# Altium PCB PCB1.PcbDoc (part 8 of 10)
Units mm, origin at the board's own origin, x right, y up, seen from the top; angles counter-clockwise.
Board outline 171.83 x 244.04 mm, 2 copper layers (Top Layer, Bottom Layer); 100 components, 186 nets, 878 pads, 221 vias.
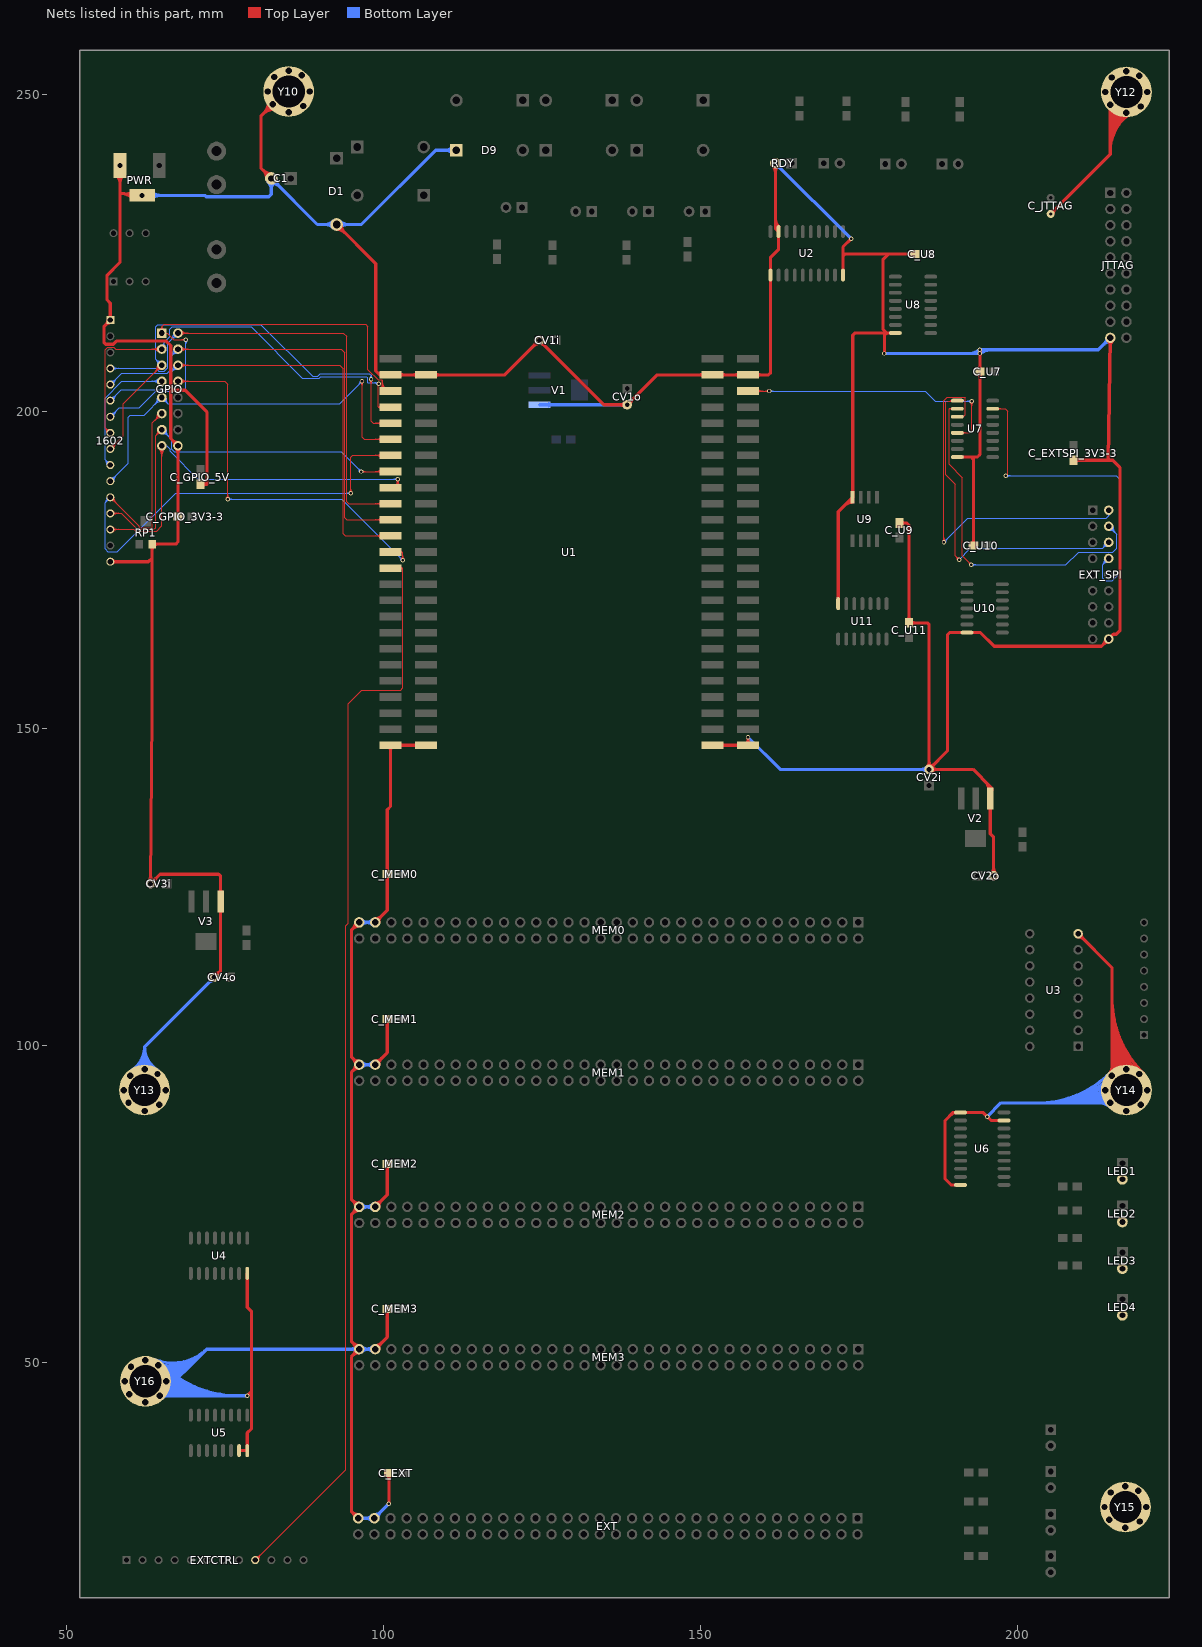
[diagram p8: the nets of this part, all layers, seen from the top]

## Via types
v1: diameter 0.7, hole 0.4, Top Layer to Bottom Layer, 221 vias

## Nets (pads, with @x,y where several pads share a name; then routed paths per layer and width w, separated by ;. In a path a pad name is that pad's centre, name@x,y a point inside that pad or via, vN(x,y) a via of type N, cw(c..) or ccw(c..) an arc to the next point about the centre after c; other vN are vias at no path point) (continued)
GND: 1602.1 1602.16 C1.2 C_EXT.1 C_EXTSPI_3V3-3.2 C_GPIO_3V3-3.1 C_GPIO_5V.1 C_JTTAG.2 C_MEM0.1 C_MEM1.1 C_MEM2.1 C_MEM3.1 C_U7.1 C_U8.1 C_U9.1 C_U10.1 C_U11.1 CV1i.2 CV1o.2 CV2i.2 CV2o.2 CV3i.2 CV4o.2 D1.1 D9.2 EXT.61 EXT.63 EXT_SPI.18 GPIO.16 JTTAG.19 LED1.2 LED2.2 LED3.2 LED4.2 MEM0.61 MEM0.63 MEM1.61 MEM1.63 MEM2.61 MEM2.63 MEM3.61 MEM3.63 PWR.2 PWR.3 RDY.2 RP1.3 U1.3 U1.4 U1.49 U1.50 U1.53 U1.54 U1.99 U1.100 U2.1 U2.10 U2.19 U3.8 U4.8 U5.7 U5.8 U6.1 U6.10 U6.19 U7.8 U8.8 U9.4 U10.7 U11.7 V1.1 V2.1 V3.1 Y10.1 Y10.2 Y10.3 Y10.4 Y10.5 Y10.6 Y10.7 Y10.8 Y10.9 Y12.1 Y12.2 Y12.3 Y12.4 Y12.5 Y12.6 Y12.7 Y12.8 Y12.9 Y13.1 Y13.2 Y13.3 Y13.4 Y13.5 Y13.6 Y13.7 Y13.8 Y13.9 Y14.1 Y14.2 Y14.3 Y14.4 Y14.5 Y14.6 Y14.7 Y14.8 Y14.9 Y15.1 Y15.2 Y15.3 Y15.4 Y15.5 Y15.6 Y15.7 Y15.8 Y15.9 Y16.1 Y16.2 Y16.3 Y16.4 Y16.5 Y16.6 Y16.7 Y16.8 Y16.9 | length 1907.8
  Top Layer w0.508: 1602.1@56.515,214.376 cw(c55.595,214.376) 56.246,213.726 cw(c56.896,213.075) 1602.1@56.896,213.995 ; 1602.1@56.627,214.645 ccw(c55.976,215.296) 56.896,215.296 ccw(c57.816,215.296) 1602.1@57.165,214.645 ; 1602.16@56.896,176.276 62.912,176.276 63.484,176.847 ; 1602.16@57.165,176.007 cw(c57.816,175.356) 57.816,176.276 cw(c57.816,177.196) 1602.16@57.165,176.545 ; PWR.2@57.892,237.233 cw(c56.619,235.959) 58.42,235.959 cw(c60.221,235.959) PWR.2@58.948,237.233 ; PWR.2@58.42,238.76 58.42,234.377 ; Y13.2@58.733,92.665 cw(c58.082,92.014) 59.002,92.014 cw(c59.922,92.014) Y13.2@59.272,92.665 ; Y16.2@58.869,46.733 cw(c58.218,46.083) 59.138,46.083 cw(c60.058,46.083) Y16.2@59.408,46.733 ; 58.917,234.332 cw(c58.727,232.232) PWR.3@60.347,233.582 ; Y13.2@59.002,93.315 ccw(c59.002,94.235) 59.653,93.585 ccw(c60.303,92.934) Y13.2@59.383,92.934 ; Y16.2@59.138,47.383 ccw(c59.138,48.303) 59.789,47.653 ccw(c60.439,47.002) Y16.2@59.519,47.002 ; 59.352,234.293 ccw(c59.487,235.779) PWR.3@60.442,234.633 ; Y13.8@59.383,90.902 ccw(c58.463,90.902) 59.114,91.553 ccw(c59.764,92.203) Y13.8@59.764,91.283 ; Y16.8@59.519,44.97 ccw(c58.599,44.97) 59.25,45.621 ccw(c59.9,46.271) Y16.8@59.9,45.351 ; Y13.6@59.749,94.951 cw(c59.098,94.3) 60.018,94.3 cw(c60.938,94.3) Y13.6@60.288,94.951 ; Y13.8@59.764,90.902 59.002,91.664 Y13.2@59.002,92.934 60.018,93.95 Y13.6@60.018,95.22 ; Y16.6@59.885,49.019 cw(c59.234,48.369) 60.154,48.369 cw(c61.074,48.369) Y16.6@60.424,49.019 ; Y16.8@59.9,44.97 59.138,45.732 Y16.2@59.138,47.002 60.154,48.018 Y16.6@60.154,49.288 ; PWR.3@61.92,234.06 58.42,234.377 ; CV3i.2@62.879,125.843 ccw(c62.02,126.719) 63.247,126.707 ccw(c64.473,126.696) CV3i.2@63.598,125.837 ; CV3i.2@63.235,125.989 ccw(c63.235,127.215) 64.102,126.348 ccw(c64.97,125.481) CV3i.2@63.743,125.481 ; RP1.3@63.239,178.753 cw(c62.649,178.163) 63.484,178.163 cw(c64.319,178.163) RP1.3@63.729,178.753 ; RP1.3@63.729,178.803 cw(c64.319,178.213) 64.319,179.048 cw(c64.319,179.883) RP1.3@63.729,179.293 ; GPIO.16@67.068,194.564 ccw(c65.871,194.564) 66.717,195.411 ccw(c67.564,196.257) GPIO.16@67.564,195.06 ; GPIO.16@67.213,194.213 cw(c66.367,193.367) 67.564,193.367 cw(c68.761,193.367) GPIO.16@67.915,194.213 ; C_GPIO_3V3-3.1@67.295,183.119 cw(c66.644,182.468) 67.564,182.468 cw(c68.484,182.468) C_GPIO_3V3-3.1@67.833,183.119 ; C_GPIO_3V3-3.1@67.295,183.657 ccw(c66.644,184.308) 67.564,184.308 ccw(c68.484,184.308) C_GPIO_3V3-3.1@67.833,183.657 ; C_GPIO_5V.1@71.12,188.468 72.111,188.468 72.136,188.493 72.136,199.898 68.707,203.327 66.421,203.327 ; C_GPIO_5V.1@71.389,188.199 cw(c72.04,187.548) 72.04,188.468 cw(c72.04,189.388) C_GPIO_5V.1@71.389,188.737 ; CV4o.2@73.268,110.738 74.295,111.765 V3.1@74.295,122.682 74.295,126.657 73.977,126.975 64.729,126.975 CV3i.2@63.235,125.481 63.484,152.369 63.484,176.847 ; CV4o.2@73.268,111.246 ccw(c73.268,112.473) 74.135,111.605 ccw(c75.003,110.738) CV4o.2@73.776,110.738 ; V3.1@74.121,121.258 cw(c73.701,120.838) 74.295,120.838 cw(c74.889,120.838) V3.1@74.469,121.258 ; V3.1@74.121,124.106 ccw(c73.701,124.526) 74.295,124.526 ccw(c74.889,124.526) V3.1@74.469,124.106 ; U5.7@77.216,36.068 U5.8@78.486,36.068 78.486,38.862 79.172,39.548 79.172,45.402 ; v1(78.486,44.716) 79.172,45.402 ; U4.8@78.486,64.008 78.486,58.674 79.172,57.988 79.172,45.402 ; 80.933,246.857 cw(c82.811,244.979) Y10.1@83.809,247.44 ; 81.048,246.972 ccw(c78.915,249.105) Y10.1@81.862,249.749 ; Y10.2@81.454,250.172 cw(c80.804,249.522) 81.723,249.522 cw(c82.643,249.522) Y10.2@81.993,250.172 ; 81.475,247.399 cw(c83.124,245.751) Y10.1@83.999,247.911 ; C1.2@81.55,236.728 ccw(c79.749,236.728) 81.022,238.002 ccw(c82.296,239.275) C1.2@82.296,237.474 ; 81.705,247.629 ccw(c79.993,249.341) Y10.1@82.358,249.858 ; Y10.2@81.723,250.822 ccw(c81.723,251.742) 82.374,251.092 ccw(c83.024,250.441) Y10.2@82.104,250.441 ; Y10.8@82.104,248.409 cw(c81.185,248.409) 81.835,247.759 cw(c82.485,247.109) Y10.8@82.485,248.028 ; Y10.8@82.257,248.714 ccw(c81.914,249.171) Y10.1@82.485,249.171 ; C1.2@82.296,236.728 80.645,238.379 80.645,246.569 Y10.8@82.485,248.409 Y10.1@82.485,249.171 ; Y10.6@82.47,252.458 cw(c81.82,251.808) 82.739,251.808 cw(c83.659,251.808) Y10.6@83.009,252.458 ; Y10.8@82.714,248.714 cw(c83.057,249.171) Y10.1@82.485,249.171 ; Y10.6@82.739,252.727 82.739,251.457 Y10.2@81.723,250.441 81.723,249.171 Y10.1@82.485,249.171 ; D1.1@92.583,228.72 cw(c92.583,226.919) 93.857,228.192 cw(c95.13,229.466) D1.1@93.329,229.466 ; D1.1@92.583,229.466 98.755,223.294 98.755,206.357 99.372,205.74 U1.53@101.092,205.74 U1.54@106.68,205.74 119.109,205.74 CV1i.2@124.576,211.207 134.753,201.03 CV1o.2@138.424,201.03 143.134,205.74 U1.3@151.892,205.74 U1.4@157.48,205.74 160.719,205.74 161.036,206.058 U2.1@161.036,221.488 161.036,224.282 162.306,225.552 U2.19@162.306,228.346 161.798,228.854 RDY.2@161.798,239.141 ; EXT.63@95.441,25.4 ccw(c94.062,25.4) 95.037,26.375 ccw(c96.012,27.35) EXT.63@96.012,25.971 ; MEM0.63@95.568,119.38 cw(c94.189,119.38) 95.164,118.405 cw(c96.139,117.43) MEM0.63@96.139,118.809 ; EXT.63@96.012,25.4 94.92,26.492 94.92,50.851 MEM3.63@96.139,52.07 94.92,53.289 94.92,73.287 MEM2.63@96.139,74.507 94.92,75.726 94.92,95.724 MEM1.63@96.139,96.943 94.92,98.163 94.92,118.161 MEM0.63@96.139,119.38 ; MEM3.63@96.139,51.499 ccw(c96.139,50.12) 95.164,51.095 ccw(c94.189,52.07) 95.568,52.07 ccw(c94.189,52.07) 95.164,53.045 ccw(c96.139,54.02) MEM3.63@96.139,52.641 ; MEM2.63@96.139,73.936 ccw(c96.139,72.557) 95.164,73.532 ccw(c94.189,74.507) 95.568,74.507 ccw(c94.189,74.507) 95.164,75.481 ccw(c96.139,76.456) MEM2.63@96.139,75.078 ; MEM1.63@96.139,96.372 ccw(c96.139,94.994) 95.164,95.969 ccw(c94.189,96.943) 95.568,96.943 ccw(c94.189,96.943) 95.164,97.918 ccw(c96.139,98.893) MEM1.63@96.139,97.514 ; MEM3.61@98.679,52.07 100.584,53.975 C_MEM3.1@100.584,58.42 ; MEM3.61@98.679,52.641 ccw(c98.679,54.02) 99.654,53.045 ccw(c100.629,52.07) MEM3.61@99.25,52.07 ; MEM2.61@98.679,74.507 100.584,76.412 C_MEM2.1@100.584,81.28 ; MEM2.61@98.679,75.078 ccw(c98.679,76.456) 99.654,75.481 ccw(c100.629,74.507) MEM2.61@99.25,74.507 ; MEM1.61@98.679,96.943 100.584,98.848 C_MEM1.1@100.584,104.14 ; MEM1.61@98.679,97.514 ccw(c98.679,98.893) 99.654,97.918 ccw(c100.629,96.943) MEM1.61@99.25,96.943 ; MEM0.61@98.679,119.38 100.584,121.285 C_MEM0.1@100.584,127 100.584,137.16 101.092,137.668 U1.99@101.092,147.32 U1.100@106.68,147.32 ; MEM0.61@98.679,119.951 ccw(c98.679,121.33) 99.654,120.355 ccw(c100.629,119.38) MEM0.61@99.25,119.38 ; 99.04,206.072 ccw(c99.419,206.451) U1.53@99.737,206.019 ; C_MEM3.1@100.315,58.151 cw(c99.664,57.5) 100.584,57.5 cw(c101.504,57.5) C_MEM3.1@100.853,58.151 ; C_MEM2.1@100.315,81.011 cw(c99.664,80.36) 100.584,80.36 cw(c101.504,80.36) C_MEM2.1@100.853,81.011 ; C_MEM1.1@100.315,103.871 cw(c99.664,103.22) 100.584,103.22 cw(c101.504,103.22) C_MEM1.1@100.853,103.871 ; C_MEM0.1@100.315,126.731 cw(c99.664,126.08) 100.584,126.08 cw(c101.504,126.08) C_MEM0.1@100.853,126.731 ; C_MEM0.1@100.315,127.269 ccw(c99.664,127.92) 100.584,127.92 ccw(c101.504,127.92) C_MEM0.1@100.853,127.269 ; C_EXT.1@100.569,32.243 cw(c99.918,31.592) 100.838,31.592 cw(c101.758,31.592) C_EXT.1@101.107,32.243 ; v1(100.838,27.686) C_EXT.1@100.838,32.512 ; U1.99@100.847,147.075 cw(c100.257,146.485) 101.092,146.485 cw(c101.927,146.485) U1.99@101.337,147.075 ; U1.99@102.487,147.075 cw(c103.077,146.485) 103.077,147.32 cw(c103.077,148.155) U1.99@102.487,147.565 ; U1.53@102.487,205.495 cw(c103.077,204.905) 103.077,205.74 cw(c103.077,206.575) U1.53@102.487,205.985 ; U1.100@105.285,147.075 ccw(c104.695,146.485) 104.695,147.32 ccw(c104.695,148.155) U1.100@105.285,147.565 ; U1.54@105.285,205.495 ccw(c104.695,204.905) 104.695,205.74 ccw(c104.695,206.575) U1.54@105.285,205.985 ; U1.54@108.075,205.495 cw(c108.665,204.905) 108.665,205.74 cw(c108.665,206.575) U1.54@108.075,205.985 ; CV1i.2@124.068,211.207 cw(c122.842,211.207) 123.709,210.34 cw(c124.576,209.472) 124.576,210.699 cw(c124.576,209.472) 125.443,210.34 cw(c126.311,211.207) CV1i.2@125.084,211.207 ; CV1o.2@138.065,200.671 ccw(c137.198,199.804) 137.198,201.03 ccw(c137.198,202.257) CV1o.2@138.065,201.389 ; CV1o.2@138.424,201.538 ccw(c138.424,202.765) 139.291,201.897 ccw(c140.159,201.03) CV1o.2@138.932,201.03 ; U1.3@150.497,205.495 ccw(c149.907,204.905) 149.907,205.74 ccw(c149.907,206.575) U1.3@150.497,205.985 ; U1.49@151.892,147.32 U1.50@157.48,147.32 v1(157.48,148.59) ; U1.49@153.287,147.075 cw(c153.877,146.485) 153.877,147.32 cw(c153.877,148.155) U1.49@153.287,147.565 ; U1.3@153.287,205.495 cw(c153.877,204.905) 153.877,205.74 cw(c153.877,206.575) U1.3@153.287,205.985 ; U1.50@156.085,147.075 ccw(c155.495,146.485) 155.495,147.32 ccw(c155.495,148.155) U1.50@156.085,147.565 ; U1.4@156.085,205.495 ccw(c155.495,204.905) 155.495,205.74 ccw(c155.495,206.575) U1.4@156.085,205.985 ; U1.50@157.235,147.565 ccw(c156.645,148.155) 157.48,148.155 ccw(c158.315,148.155) U1.50@157.725,147.565 ; U1.4@158.875,205.495 cw(c159.465,204.905) 159.465,205.74 cw(c159.465,206.575) U1.4@158.875,205.985 ; RDY.2@161.377,238.72 cw(c160.359,237.702) 161.798,237.702 cw(c163.237,237.702) RDY.2@162.219,238.72 ; 161.798,230.406 ccw(c163.655,230.406) U2.19@162.342,229.093 ; U11.7@171.704,169.672 171.704,184.152 U9.4@173.988,186.436 173.988,212.025 174.308,212.344 179.387,212.344 ; U2.10@172.466,221.488 172.466,224.472 ; 172.688,185.135 cw(c173.988,183.834) U9.4@173.988,185.674 ; 173.555,186.002 cw(c173.988,185.569) U9.4@173.988,186.182 ; v1(173.736,227.203) 172.466,225.933 172.466,224.472 ; v1(178.994,209.118) 178.994,211.95 179.387,212.344 ; U8.8@180.721,212.344 179.387,212.344 ; C_U9.1@181.356,182.372 182.562,182.372 182.88,182.054 C_U11.1@182.88,166.624 185.737,166.624 186.038,166.323 CV2i.2@186.038,143.515 ; C_U9.1@181.625,182.103 cw(c182.276,181.452) 182.276,182.372 cw(c182.276,183.292) C_U9.1@181.625,182.641 ; C_U11.1@182.611,167.02 ccw(c181.96,167.671) 182.88,167.671 ccw(c183.8,167.671) C_U11.1@183.149,167.02 ; C_U11.1@183.149,166.355 cw(c183.8,165.704) 183.8,166.624 cw(c183.8,167.544) C_U11.1@183.149,166.893 ; C_U8.1@183.373,224.521 ccw(c182.722,223.87) 182.722,224.79 ccw(c182.722,225.71) C_U8.1@183.373,225.059 ; C_U8.1@183.769,224.79 179.641,224.79 ; CV2i.2@185.679,143.874 ccw(c184.812,144.741) 186.038,144.741 ccw(c187.265,144.741) 186.398,143.874 ccw(c187.265,144.741) 187.265,143.515 ccw(c187.265,142.289) CV2i.2@186.398,143.156 ; CV2i.2@186.038,144.023 ccw(c186.038,145.249) 186.906,144.382 ccw(c187.773,143.515) CV2i.2@186.546,143.515 ; 189.473,89.016 cw(c190.297,88.192) U6.1@190.297,89.357 ; 189.649,89.192 cw(c190.109,88.732) U6.1@190.283,89.359 ; U7.8@190.5,192.786 192.722,192.786 ; U6.10@191.008,77.978 189.496,77.978 188.555,78.919 188.555,88.098 189.865,89.408 U6.1@191.008,89.408 194.539,89.408 195.219,88.742 195.837,88.138 ; C_U10.1@192.771,179.085 ccw(c192.12,179.736) 193.04,179.736 ccw(c193.96,179.736) C_U10.1@193.309,179.085 ; C_U10.1@193.04,178.816 193.04,192.469 192.722,192.786 ; C_U7.1@193.787,205.979 cw(c193.136,205.328) 194.056,205.328 cw(c194.976,205.328) C_U7.1@194.325,205.979 ; C_U7.1@193.787,206.517 ccw(c193.136,207.168) 194.056,207.168 ccw(c194.976,207.168) C_U7.1@194.325,206.517 ; v1(194.056,209.702) v1(194.056,209.118) C_U7.1@194.056,206.248 194.056,193.167 193.675,192.786 192.722,192.786 ; 194.837,141.662 cw(c193.358,140.182) V2.1@195.45,140.182 ; v1(195.226,88.749) 195.837,88.138 ; V2.1@195.522,137.508 cw(c195.102,137.088) 195.696,137.088 cw(c196.29,137.088) V2.1@195.87,137.508 ; V2.1@195.522,140.356 ccw(c195.102,140.776) 195.696,140.776 ccw(c196.29,140.776) V2.1@195.87,140.356 ; 195.705,140.795 cw(c195.092,140.182) V2.1@195.958,140.182 ; CV2o.2@195.856,127.105 ccw(c194.989,127.972) 196.215,127.972 ccw(c197.441,127.972) CV2o.2@196.574,127.105 ; CV2o.2@196.215,126.746 196.215,132.842 195.696,133.361 V2.1@195.696,138.932 195.696,140.803 192.984,143.515 CV2i.2@186.038,143.515 ; U6.19@197.866,88.138 195.837,88.138 ; C_JTTAG.2@205.222,231.13 214.625,240.533 Y12.8@214.625,248.33 213.863,249.092 Y12.2@213.863,250.362 214.879,251.378 Y12.6@214.879,252.648 ; C_JTTAG.2@205.222,231.511 ccw(c205.222,232.431) 205.873,231.781 ccw(c206.523,231.13) C_JTTAG.2@205.603,231.13 ; C_EXTSPI_3V3-3.2@208.788,192.278 214.312,192.278 ; C_EXTSPI_3V3-3.2@209.057,192.009 cw(c209.708,191.358) 209.708,192.278 cw(c209.708,193.198) C_EXTSPI_3V3-3.2@209.057,192.547 ; U3.8@209.55,117.106 cw(c209.55,115.909) 210.397,116.755 cw(c211.243,117.602) U3.8@210.046,117.602 ; U3.8@209.55,117.602 214.879,112.273 Y14.6@214.879,95.22 214.879,93.95 Y14.2@213.863,92.934 213.863,91.664 Y14.8@214.625,90.902 ; Y15.2@213.438,26.902 cw(c212.788,26.251) 213.707,26.251 cw(c214.627,26.251) Y15.2@213.977,26.902 ; Y14.2@213.594,92.665 cw(c212.943,92.014) 213.863,92.014 cw(c214.783,92.014) Y14.2@214.132,92.665 ; Y12.2@213.594,250.092 cw(c212.943,249.442) 213.863,249.442 cw(c214.783,249.442) Y12.2@214.132,250.092 ; Y15.2@213.707,27.552 ccw(c213.707,28.472) 214.358,27.821 ccw(c215.008,27.171) Y15.2@214.088,27.171 ; Y14.2@213.863,93.315 ccw(c213.863,94.235) 214.513,93.585 ccw(c215.164,92.934) Y14.2@214.244,92.934 ; Y12.2@213.863,250.743 ccw(c213.863,251.663) 214.513,251.012 ccw(c215.164,250.362) Y12.2@214.244,250.362 ; EXT_SPI.18@213.88,164.084 cw(c212.683,164.084) 213.529,163.237 cw(c214.376,162.391) EXT_SPI.18@214.376,163.588 ; Y15.8@214.088,25.139 ccw(c213.169,25.139) 213.819,25.789 ccw(c214.469,26.44) Y15.8@214.469,25.52 ; JTTAG.19@214.22,211.185 cw(c213.229,210.226) 214.607,210.204 cw(c215.986,210.181) JTTAG.19@215.027,211.172 ; Y14.8@214.244,90.902 ccw(c213.324,90.902) 213.975,91.553 ccw(c214.625,92.203) Y14.8@214.625,91.283 ; Y12.8@214.244,248.33 ccw(c213.324,248.33) 213.975,248.98 ccw(c214.625,249.631) Y12.8@214.625,248.711 ; Y12.8@214.356,248.06 cw(c213.705,247.41) 214.625,247.41 cw(c215.545,247.41) Y12.8@214.894,248.06 ; Y15.6@214.454,29.188 cw(c213.804,28.537) 214.723,28.537 cw(c215.643,28.537) Y15.6@214.993,29.188 ; Y15.8@214.469,25.139 213.707,25.901 Y15.2@213.707,27.171 214.723,28.187 Y15.6@214.723,29.457 ; Y14.6@214.516,95.583 ccw(c213.639,96.46) 214.879,96.46 ccw(c220.691,96.46) Y14.1@216.581,92.351 ; Y14.6@214.61,94.951 cw(c213.959,94.3) 214.879,94.3 cw(c215.799,94.3) Y14.6@215.148,94.951 ; Y14.6@214.61,95.49 ccw(c213.959,96.14) 214.879,96.14 ccw(c215.799,96.14) Y14.6@215.148,95.49 ; Y12.6@214.61,252.378 cw(c213.959,251.728) 214.879,251.728 cw(c215.799,251.728) Y12.6@215.148,252.378 ; 214.625,241.03 cw(c221.81,241.03) Y12.1@218.608,247.463 ; 214.625,241.851 cw(c221.401,241.851) Y12.1@218.382,247.917 ; 214.625,242.671 cw(c220.993,242.671) Y12.1@218.155,248.372 ; 214.625,243.491 cw(c220.585,243.491) Y12.1@217.929,248.827 ; 214.625,244.312 cw(c220.176,244.312) Y12.1@217.703,249.282 ; 214.625,245.132 cw(c219.768,245.132) Y12.1@217.476,249.736 ; 214.625,245.952 cw(c219.36,245.952) Y12.1@217.25,250.191 ; 214.625,246.773 cw(c218.951,246.773) Y12.1@217.023,250.646 ; JTTAG.19@214.63,211.582 214.312,192.278 ; 214.879,97.687 ccw(c221.917,97.687) Y14.1@216.94,92.71 ; 214.879,98.913 ccw(c223.144,98.913) Y14.1@217.3,93.069 ; 214.879,100.14 ccw(c224.37,100.14) Y14.1@217.659,93.428 ; 214.879,101.366 ccw(c225.597,101.366) Y14.1@218.018,93.787 ; 214.879,102.592 ccw(c226.823,102.592) Y14.1@218.377,94.147 ; 214.879,103.819 ccw(c228.049,103.819) Y14.1@218.736,94.506 ; 214.879,105.045 ccw(c229.276,105.045) Y14.9@219.096,94.865 ; 214.879,106.272 ccw(c230.502,106.272) Y14.9@219.455,95.224 ; 214.879,107.498 ccw(c231.729,107.498) Y14.9@219.814,95.583 ; 58.42,234.377 58.42,223.52 56.388,221.488 56.388,217.551 56.896,217.043 1602.1@56.896,214.376 55.88,213.36 55.88,210.883 56.172,210.591 57.379,210.591 57.861,211.074 65.722,211.074 66.421,210.375 66.421,203.327 ; 63.484,176.847 RP1.3@63.484,179.048 67.225,179.048 67.564,179.387 C_GPIO_3V3-3.1@67.564,183.388 GPIO.16@67.564,194.564 66.421,195.707 66.421,203.327 ; 172.466,224.472 172.784,224.79 179.641,224.79 ; 179.387,212.344 178.765,212.928 178.765,223.914 179.641,224.79 ; CV2i.2@186.038,143.515 188.951,146.427 188.951,164.782 189.268,165.1 U10.7@192.024,165.1 194.158,165.1 196.317,162.941 213.233,162.941 EXT_SPI.18@214.376,164.084 215.123,164.831 215.582,164.831 216.142,165.391 216.142,191.147 215.011,192.278 214.312,192.278
  Bottom Layer w0.508: Y13.1@60.287,96.091 ccw(c57.934,99.774) 62.304,99.774 ; Y13.1@60.561,95.663 ccw(c58.527,98.846) 62.304,98.846 ccw(c66.082,98.846) Y13.9@64.048,95.663 ; Y13.1@60.834,95.235 ccw(c59.119,97.919) 62.304,97.919 ccw(c65.489,97.919) Y13.9@63.774,95.235 ; Y13.1@61.108,94.807 ccw(c59.712,96.992) 62.304,96.992 ccw(c64.896,96.992) Y13.1@63.501,94.807 ; Y16.1@61.857,46.419 ccw(c65.966,50.528) 65.966,44.716 ccw(c65.966,43.477) Y16.7@65.089,44.353 ; PWR.3@61.92,234.06 71.781,234.06 71.984,233.858 81.915,233.858 82.296,234.239 C1.2@82.296,236.728 89.558,229.466 D1.1@92.583,229.466 96.497,229.466 108.204,241.173 D9.2@111.483,241.173 ; Y16.1@61.925,45.773 ccw(c63.622,49.823) 66.727,46.718 ; Y13.5@62.035,96.506 ccw(c61.384,97.156) 62.304,97.156 ccw(c63.224,97.156) Y13.5@62.574,96.506 ; Y16.1@62.121,46.241 ccw(c63.938,50.577) 67.263,47.253 ; Y16.1@62.216,46.778 ccw(c67.193,51.755) 67.193,44.716 ; Y13.4@62.304,89.632 63.32,90.648 Y13.7@64.59,90.648 ; Y13.4@62.304,90.013 ccw(c62.304,90.933) 62.955,90.283 ccw(c63.605,89.632) Y13.4@62.685,89.632 ; Y13.5@62.304,95.855 cw(c62.304,94.935) 62.955,95.586 cw(c63.605,96.236) Y13.5@62.685,96.236 ; Y16.1@62.318,46.71 ccw(c64.254,51.332) 67.798,47.788 ; Y16.4@62.44,43.7 63.456,44.716 Y16.7@64.726,44.716 ; Y16.4@62.44,44.081 ccw(c62.44,45.001) 63.091,44.351 ccw(c63.741,43.7) Y16.4@62.821,43.7 ; Y16.5@62.44,49.923 cw(c62.44,49.004) 63.091,49.654 cw(c63.741,50.304) Y16.5@62.821,50.304 ; Y16.5@62.44,50.304 63.202,49.542 Y16.9@64.472,49.542 ; Y16.1@62.514,47.178 ccw(c64.57,52.086) 68.333,48.323 ; Y16.1@62.575,47.137 ccw(c68.419,52.981) 68.419,44.716 ; Y16.1@62.71,47.647 ccw(c64.887,52.84) 68.868,48.858 ; Y16.1@62.907,48.115 ccw(c65.203,53.594) 69.403,49.394 ; Y16.1@62.934,47.496 ccw(c69.646,54.208) 69.646,44.716 ; Y16.1@63.103,48.584 ccw(c65.519,54.349) 69.939,49.929 ; Y16.1@63.293,47.856 ccw(c70.872,55.434) 70.872,44.716 ; Y16.1@63.299,49.052 ccw(c65.835,55.103) 70.474,50.464 ; PWR.3@63.448,233.532 cw(c64.721,232.259) 64.721,234.06 cw(c64.721,235.861) PWR.3@63.448,234.587 ; Y16.1@63.496,49.521 ccw(c66.151,55.857) 71.009,50.999 ; Y16.1@63.653,48.215 ccw(c72.098,56.661) 72.098,44.716 ; Y16.1@63.692,49.989 ccw(c66.467,56.612) 71.544,51.534 ; Y16.1@63.888,50.458 ccw(c66.783,57.366) 72.079,52.07 ; Y16.1@64.012,48.574 ccw(c73.325,57.887) 73.325,44.716 ; Y13.9@64.067,95.205 ccw(c63.416,94.554) 63.416,95.474 ccw(c63.416,96.394) Y13.9@64.067,95.744 ; Y16.9@64.203,49.273 ccw(c63.552,48.623) 63.552,49.542 ccw(c63.552,50.462) Y16.9@64.203,49.812 ; Y13.7@64.321,90.379 ccw(c63.67,89.728) 63.67,90.648 ccw(c63.67,91.568) Y13.7@64.321,90.918 ; Y13.9@64.321,96.091 cw(c66.674,99.774) 62.304,99.774 ; Y13.9@64.336,95.474 63.066,95.474 Y13.5@62.304,96.236 62.304,99.774 ; Y16.9@64.371,48.933 ccw(c74.551,59.113) 74.551,44.716 ; Y16.7@64.457,44.447 ccw(c63.806,43.797) 63.806,44.716 ccw(c63.806,45.636) Y16.7@64.457,44.986 ; Y16.7@64.726,45.097 ccw(c64.726,46.017) 65.377,45.367 ccw(c66.027,44.716) Y16.7@65.107,44.716 ; Y16.9@64.73,49.292 ccw(c75.778,60.34) 75.778,44.716 ; Y16.7@64.996,44.447 cw(c65.646,43.797) 65.646,44.716 cw(c65.646,45.636) Y16.7@64.996,44.986 ; Y16.9@65.089,49.652 ccw(c77.004,61.566) 77.004,44.716 ; CV4o.2@72.76,110.738 cw(c71.534,110.738) 72.401,109.871 cw(c73.268,109.004) CV4o.2@73.268,110.23 ; CV4o.2@73.268,110.738 62.304,99.774 ; v1(78.486,44.716) Y16.7@64.726,44.716 ; C1.2@81.768,236.2 cw(c80.495,234.927) 82.296,234.927 cw(c84.097,234.927) C1.2@82.824,236.2 ; C1.2@82.296,235.982 cw(c82.296,234.181) 83.57,235.454 cw(c84.843,236.728) C1.2@83.042,236.728 ; Y10.4@85.025,247.139 86.041,248.155 Y10.7@87.311,248.155 ; Y10.4@85.025,247.52 ccw(c85.025,248.44) 85.676,247.79 ccw(c86.326,247.139) Y10.4@85.406,247.139 ; Y10.5@85.025,253.362 cw(c85.025,252.443) 85.676,253.093 cw(c86.326,253.743) Y10.5@85.406,253.743 ; Y10.5@85.025,253.743 85.787,252.981 Y10.9@87.057,252.981 ; Y10.9@86.788,252.712 ccw(c86.138,252.062) 86.138,252.981 ccw(c86.138,253.901) Y10.9@86.788,253.251 ; Y10.7@87.042,247.886 ccw(c86.392,247.236) 86.392,248.155 ccw(c86.392,249.075) Y10.7@87.042,248.425 ; D1.1@92.055,228.938 ccw(c90.782,227.665) 90.782,229.466 ccw(c90.782,231.267) D1.1@92.055,229.993 ; D1.1@93.111,228.938 cw(c94.384,227.665) 94.384,229.466 cw(c94.384,231.267) D1.1@93.111,229.993 ; MEM3.63@95.735,51.666 ccw(c94.76,50.691) 94.76,52.07 ccw(c94.76,53.449) MEM3.63@95.735,52.474 ; EXT.63@96.012,25.4 EXT.61@98.552,25.4 v1(100.838,27.686) ; MEM2.63@96.139,74.507 MEM2.61@98.679,74.507 ; MEM1.63@96.139,96.943 MEM1.61@98.679,96.943 ; MEM0.63@96.139,119.38 MEM0.61@98.679,119.38 ; MEM3.63@96.543,51.666 cw(c97.518,50.691) 97.518,52.07 cw(c97.518,53.449) MEM3.63@96.543,52.474 ; MEM2.63@96.543,74.103 cw(c97.518,73.128) 97.518,74.507 cw(c97.518,75.885) MEM2.63@96.543,74.91 ; MEM1.63@96.543,96.54 cw(c97.518,95.565) 97.518,96.943 cw(c97.518,98.322) MEM1.63@96.543,97.347 ; MEM0.63@96.543,118.976 cw(c97.518,118.001) 97.518,119.38 cw(c97.518,120.759) MEM0.63@96.543,119.784 ; EXT.61@98.148,24.996 ccw(c97.173,24.021) 97.173,25.4 ccw(c97.173,26.779) EXT.61@98.148,25.804 ; MEM3.61@98.275,51.666 ccw(c97.3,50.691) 97.3,52.07 ccw(c97.3,53.449) MEM3.61@98.275,52.474 ; MEM2.61@98.275,74.103 ccw(c97.3,73.128) 97.3,74.507 ccw(c97.3,75.885) MEM2.61@98.275,74.91 ; MEM1.61@98.275,96.54 ccw(c97.3,95.565) 97.3,96.943 ccw(c97.3,98.322) MEM1.61@98.275,97.347 ; MEM0.61@98.275,118.976 ccw(c97.3,118.001) 97.3,119.38 ccw(c97.3,120.759) MEM0.61@98.275,119.784 ; EXT.61@98.552,25.971 ccw(c98.552,27.35) 99.527,26.375 ccw(c100.502,25.4) EXT.61@99.123,25.4 ; MEM3.61@98.679,52.07 MEM3.63@96.139,52.07 72.08,52.07 ; D9.2@110.955,240.645 ccw(c109.682,239.372) 109.682,241.173 ccw(c109.682,242.974) D9.2@110.955,241.701 ; V1.1@124.587,201.041 131.496,201.041 131.507,201.03 CV1o.2@138.424,201.03 ; V1.1@126.011,200.867 cw(c126.431,200.447) 126.431,201.041 cw(c126.431,201.635) V1.1@126.011,201.215 ; CV1o.2@138.065,200.671 ccw(c137.198,199.804) 137.198,201.03 ccw(c137.198,202.257) CV1o.2@138.065,201.389 ; v1(157.48,148.59) 162.555,143.515 CV2i.2@186.038,143.515 ; RDY.2@161.798,238.545 cw(c161.798,237.106) 162.815,238.124 cw(c163.833,239.141) RDY.2@162.394,239.141 ; RDY.2@161.798,239.141 v1(173.736,227.203) ; v1(178.994,209.118) v1(194.056,209.118) ; CV2i.2@185.679,143.156 ccw(c184.812,142.289) 184.812,143.515 ccw(c184.812,144.741) CV2i.2@185.679,143.874 ; 192.414,209.118 ccw(c192.414,211.345) v1@193.988,209.77 ; 193.64,209.118 ccw(c193.64,210.118) 194.347,209.411 ; 193.765,209.41 cw(c194.472,208.702) 194.472,209.702 ; v1(194.056,209.702) 212.75,209.702 JTTAG.19@214.63,211.582 ; v1@194.124,209.05 cw(c195.698,207.476) 195.698,209.702 ; v1(195.226,88.749) 197.379,90.902 Y14.8@214.625,90.902 ; 203.214,90.902 ccw(c203.214,106.885) Y14.6@214.516,95.583 ; 204.441,90.902 ccw(c204.441,105.658) Y14.6@214.875,95.224 ; 205.667,90.902 ccw(c205.667,104.432) Y14.6@215.234,94.865 ; 206.894,90.902 ccw(c206.894,103.206) Y14.1@215.593,94.506 ; 208.12,90.902 ccw(c208.12,101.979) Y14.1@215.953,94.147 ; 209.346,90.902 ccw(c209.346,100.753) Y14.1@216.312,93.787 ; 210.573,90.902 ccw(c210.573,99.526) Y14.1@216.671,93.428 ; 211.799,90.902 ccw(c211.799,98.3) Y14.1@217.03,93.069 ; JTTAG.19@214.059,211.582 cw(c212.68,211.582) 213.655,210.607 cw(c214.63,209.632) JTTAG.19@214.63,211.011 ; Y14.8@214.356,90.633 ccw(c213.705,89.982) 213.705,90.902 ccw(c213.705,91.822) Y14.8@214.356,91.172 ; Y14.8@214.516,90.285 ccw(c213.026,88.795) 213.026,90.902 ccw(c213.026,97.073) Y14.1@217.389,92.71 ; Y15.4@217.009,23.869 218.025,24.885 Y15.7@219.295,24.885 ; Y15.4@217.009,24.25 ccw(c217.009,25.17) 217.66,24.519 ccw(c218.31,23.869) Y15.4@217.39,23.869 ; Y15.5@217.009,30.092 cw(c217.009,29.172) 217.66,29.823 cw(c218.31,30.473) Y15.5@217.39,30.473 ; Y15.5@217.009,30.473 217.771,29.711 Y15.9@219.041,29.711 ; Y14.4@217.165,89.632 218.181,90.648 Y14.7@219.451,90.648 ; Y14.4@217.165,90.013 ccw(c217.165,90.933) 217.815,90.283 ccw(c218.466,89.632) Y14.4@217.546,89.632 ; Y14.5@217.165,95.855 cw(c217.165,94.935) 217.815,95.586 cw(c218.466,96.236) Y14.5@217.546,96.236 ; Y14.5@217.165,96.236 217.927,95.474 Y14.9@219.197,95.474 ; Y12.4@217.165,247.06 218.181,248.076 Y12.7@219.451,248.076 ; Y12.4@217.165,247.441 ccw(c217.165,248.361) 217.815,247.71 ccw(c218.466,247.06) Y12.4@217.546,247.06 ; Y12.5@217.165,253.283 cw(c217.165,252.363) 217.815,253.013 cw(c218.466,253.664) Y12.5@217.546,253.664 ; Y12.5@217.165,253.664 217.927,252.902 Y12.9@219.197,252.902 ; Y15.9@218.772,29.442 ccw(c218.122,28.791) 218.122,29.711 ccw(c218.122,30.631) Y15.9@218.772,29.98 ; Y14.9@218.928,95.205 ccw(c218.277,94.554) 218.277,95.474 ccw(c218.277,96.394) Y14.9@218.928,95.744 ; Y12.9@218.928,252.632 ccw(c218.277,251.982) 218.277,252.902 ccw(c218.277,253.822) Y12.9@218.928,253.171 ; Y15.7@219.026,24.616 ccw(c218.376,23.965) 218.376,24.885 ccw(c218.376,25.805) Y15.7@219.026,25.154 ; Y14.7@219.182,90.379 ccw(c218.531,89.728) 218.531,90.648 ccw(c218.531,91.568) Y14.7@219.182,90.918 ; Y12.7@219.182,247.806 ccw(c218.531,247.156) 218.531,248.076 ccw(c218.531,248.996) Y12.7@219.182,248.345 ; Y16.7@64.726,44.716 72.08,52.07
GPIO00: 1602.7 GPIO.1 U1.55 | length 83.9
  Top Layer w0.152: GPIO.1@64.762,212.965 ccw(c64.595,213.36) 65.024,213.36 ; GPIO.1@64.821,212.824 ccw(c64.692,213.13) 65.024,213.13 ccw(c65.356,213.13) GPIO.1@65.227,212.824 ; GPIO.1@65.286,212.965 cw(c65.453,213.36) 65.024,213.36 ; v1@68.615,211.109 ccw(c68.148,210.642) 68.148,211.303 ccw(c68.148,211.964) v1@68.615,211.496 ; v1(68.809,211.303) 66.916,211.303 65.875,212.344 GPIO.1@65.024,212.344 65.024,213.36 ; U1.55@99.572,203.57 ccw(c99.09,204.052) 99.771,204.052 ; 99.771,204.141 ccw(c100.883,204.141) U1.55@100.097,203.355 ; 99.771,204.509 ccw(c101.251,204.509) U1.55@100.205,203.463 ; 99.771,204.877 ccw(c101.619,204.877) U1.55@100.312,203.57 ; U1.55@101.092,203.2 99.771,203.2 99.771,204.911 99.746,204.937 99.136,204.937 97.536,206.537 97.536,213.36 97.18,213.716 65.38,213.716 65.024,213.36
  Bottom Layer w0.152: 1602.7@56.896,199.136 58.293,200.533 61.455,200.533 64.059,203.137 68.428,203.137 68.809,203.517 v1(68.809,211.303) ; 1602.7@56.896,199.542 ccw(c56.896,200.524) 57.59,199.83 ccw(c58.284,199.136) 1602.7@57.302,199.136 ; 1602.7@56.896,199.695 ccw(c56.896,201.044) 57.85,200.09 ccw(c58.804,199.136) 1602.7@57.455,199.136 ; v1@68.615,211.109 cw(c68.148,210.642) 68.809,210.642 cw(c69.47,210.642) v1@69.002,211.109
GPIO01: 1602.8 GPIO.3 U1.57 | length 82.9
  Top Layer w0.152: 1602.8@56.34,196.649 ccw(c55.366,196.743) 56.058,197.434 ; 1602.8@56.491,196.635 ccw(c55.784,196.703) 56.286,197.206 ccw(c56.789,197.708) 1602.8@56.857,197.001 ; 1602.8@56.843,197.152 cw(c56.749,198.126) 56.058,197.434 ; 1602.8@56.896,196.596 56.058,197.434 ; GPIO.3@64.548,209.328 ccw(c63.397,208.177) 63.397,209.804 ccw(c63.397,211.431) GPIO.3@64.548,210.28 ; GPIO.3@64.655,209.435 ccw(c63.765,208.545) 63.765,209.804 ccw(c63.765,211.063) GPIO.3@64.655,210.173 ; GPIO.3@64.763,209.543 ccw(c64.133,208.913) 64.133,209.804 ccw(c64.133,210.695) GPIO.3@64.763,210.065 ; GPIO.3@65.024,209.804 57.734,209.804 57.404,210.134 56.515,210.134 56.058,209.677 56.058,197.434 ; v1(99.212,204.356) 99.136,204.279 99.136,200.685 99.162,200.66 ; U1.57@99.457,200.462 ccw(c99.162,200.341) 99.162,200.66 ; U1.57@99.457,200.858 cw(c99.162,200.979) 99.162,200.66 ; U1.57@101.092,200.66 99.162,200.66
  Bottom Layer w0.152: GPIO.3@65.008,210.478 ccw(c64.999,210.883) 65.405,210.883 ; GPIO.3@65.012,210.325 ccw(c65.003,210.728) 65.405,210.728 ; GPIO.3@65.015,210.173 ccw(c65.006,210.572) 65.405,210.572 ; GPIO.3@65.024,209.804 65.405,210.185 65.405,210.883 ; 65.405,210.511 ccw(c65.731,210.511) GPIO.3@65.5,210.28 ; 98.262,204.476 cw(c98.262,203.405) v1@99.019,204.162 ; 98.63,204.476 cw(c98.63,203.773) v1@99.127,204.27 ; 98.841,204.476 ccw(c98.841,204.727) v1@99.019,204.549 ; v1(99.212,204.356) 99.093,204.476 97.511,204.476 97.465,204.521 97.465,205.353 97.333,205.486 90.076,205.486 89.814,205.225 87.205,205.225 79.121,213.309 66.675,213.309 66.294,212.928 66.294,211.772 65.405,210.883
GPIO02: 1602.9 GPIO.5 U1.59 | length 89.7
  Top Layer w0.152: 1602.9@56.896,194.056 58.953,196.113 58.953,201.193 GPIO.5@65.024,207.264 ; 1602.9@56.896,194.462 ccw(c56.896,195.444) 57.59,194.75 ccw(c58.284,194.056) 1602.9@57.302,194.056 ; 1602.9@56.896,194.615 ccw(c56.896,195.964) 57.85,195.01 ccw(c58.804,194.056) 1602.9@57.455,194.056 ; GPIO.5@64.35,207.264 cw(c62.724,207.264) 63.874,206.114 cw(c65.024,204.964) GPIO.5@65.024,206.59 ; GPIO.5@64.503,207.264 cw(c63.244,207.264) 64.134,206.374 cw(c65.024,205.484) GPIO.5@65.024,206.743 ; GPIO.5@64.655,207.264 cw(c63.764,207.264) 64.394,206.634 cw(c65.024,206.004) GPIO.5@65.024,206.895 ; v1@97.825,204.835 cw(c97.358,204.368) 98.019,204.368 cw(c98.68,204.368) v1@98.212,204.835 ; v1(98.019,205.029) 98.019,198.438 98.336,198.12 U1.59@101.092,198.12 ; U1.59@99.572,197.75 ccw(c98.677,196.855) 98.677,198.12 ccw(c98.677,199.385) U1.59@99.572,198.49 ; U1.59@99.679,197.857 ccw(c99.045,197.223) 99.045,198.12 ccw(c99.045,199.017) U1.59@99.679,198.383
  Bottom Layer w0.152: GPIO.5@64.356,207.352 ccw(c63.319,207.49) 64.059,208.229 ; GPIO.5@64.507,207.332 ccw(c63.705,207.439) 64.277,208.011 ccw(c64.849,208.583) GPIO.5@64.956,207.781 ; GPIO.5@64.936,207.932 cw(c64.798,208.969) 64.059,208.229 ; GPIO.5@65.024,207.264 64.059,208.229 ; v1@97.831,205.228 ccw(c97.419,205.664) 98.019,205.664 ; v1(98.019,205.029) 98.019,205.664 ; v1@98.207,205.228 cw(c98.618,205.664) 98.019,205.664 ; 64.059,208.229 64.059,213.36 64.376,213.677 80.658,213.677 88.831,205.504 89.629,205.504 90.043,205.918 97.765,205.918 98.019,205.664
GPIO03: 1602.10 GPIO.7 | length 29.9
  Bottom Layer w0.152: 1602.10@56.34,191.569 ccw(c55.366,191.663) 56.058,192.354 ; 1602.10@56.491,191.555 ccw(c55.784,191.623) 56.286,192.126 ccw(c56.789,192.628) 1602.10@56.857,191.921 ; 1602.10@56.843,192.072 cw(c56.749,193.046) 56.058,192.354 ; 1602.10@56.896,191.516 56.058,192.354 ; GPIO.7@64.548,204.248 ccw(c63.397,203.097) 63.397,204.724 ccw(c63.397,206.351) GPIO.7@64.548,205.2 ; GPIO.7@64.655,204.355 ccw(c63.765,203.465) 63.765,204.724 ccw(c63.765,205.983) GPIO.7@64.655,205.093 ; GPIO.7@64.763,204.463 ccw(c64.133,203.833) 64.133,204.724 ccw(c64.133,205.615) GPIO.7@64.763,204.985 ; GPIO.7@65.024,204.724 58.725,204.724 56.058,202.057 56.058,192.354
GPIO04: 1602.11 GPIO.9 U1.61 | length 83.3
  Top Layer w0.152: v1@96.404,204.574 cw(c95.936,204.107) 96.597,204.107 cw(c97.258,204.107) v1@96.791,204.574 ; v1(96.597,204.768) 96.597,195.897 96.915,195.58 U1.61@101.092,195.58 ; U1.61@99.572,195.21 ccw(c98.677,194.315) 98.677,195.58 ccw(c98.677,196.845) U1.61@99.572,195.95 ; U1.61@99.679,195.317 ccw(c99.045,194.683) 99.045,195.58 ccw(c99.045,196.477) U1.61@99.679,195.843
  Bottom Layer w0.152: 1602.11@56.896,188.976 59.715,191.795 59.715,199.072 60.033,199.39 62.23,199.39 GPIO.9@65.024,202.184 65.989,201.219 ; 1602.11@56.896,189.382 ccw(c56.896,190.364) 57.59,189.67 ccw(c58.284,188.976) 1602.11@57.302,188.976 ; 1602.11@56.896,189.535 ccw(c56.896,190.884) 57.85,189.93 ccw(c58.804,188.976) 1602.11@57.455,188.976 ; GPIO.9@64.35,202.184 cw(c62.724,202.184) 63.874,201.034 cw(c65.024,199.884) GPIO.9@65.024,201.51 ; GPIO.9@64.503,202.184 cw(c63.244,202.184) 64.134,201.294 cw(c65.024,200.404) GPIO.9@65.024,201.663 ; GPIO.9@64.655,202.184 cw(c63.764,202.184) 64.394,201.554 cw(c65.024,200.924) GPIO.9@65.024,201.815 ; GPIO.9@65.092,201.667 cw(c65.199,200.865) 65.771,201.437 cw(c66.343,202.009) GPIO.9@65.541,202.116 ; GPIO.9@65.112,201.516 cw(c65.25,200.479) 65.989,201.219 ; GPIO.9@65.692,202.096 ccw(c66.729,201.958) 65.989,201.219 ; v1@96.324,204.768 cw(c95.663,204.768) 96.13,204.3 cw(c96.597,203.833) v1@96.597,204.494 ; v1(96.597,204.768) 93.049,201.219 65.989,201.219
GPIO05: 1602.12 GPIO.11 U1.63 | length 108.7
  Top Layer w0.152: 1602.12@56.896,185.877 cw(c56.896,184.528) 57.85,185.482 cw(c58.804,186.436) 1602.12@57.455,186.436 ; 1602.12@56.896,186.03 cw(c56.896,185.048) 57.59,185.742 cw(c58.284,186.436) 1602.12@57.302,186.436 ; 1602.12@56.896,186.436 61.431,181.901 61.431,181.682 61.468,181.645 63.5,181.645 63.537,181.682 63.537,198.157 GPIO.11@65.024,199.644 ; GPIO.11@64.35,199.644 cw(c62.724,199.644) 63.874,198.494 cw(c65.024,197.344) GPIO.11@65.024,198.97 ; GPIO.11@64.503,199.644 cw(c63.244,199.644) 64.134,198.754 cw(c65.024,197.864) GPIO.11@65.024,199.123 ; GPIO.11@64.655,199.644 cw(c63.764,199.644) 64.394,199.014 cw(c65.024,198.384) GPIO.11@65.024,199.275 ; v1@94.625,187.265 ccw(c94.157,187.732) 94.818,187.732 ccw(c95.479,187.732) v1@95.012,187.265 ; v1(94.818,187.071) 94.818,192.722 95.136,193.04 U1.63@101.092,193.04 ; U1.63@99.572,192.67 ccw(c98.677,191.775) 98.677,193.04 ccw(c98.677,194.305) U1.63@99.572,193.41 ; U1.63@99.679,192.777 ccw(c99.045,192.143) 99.045,193.04 ccw(c99.045,193.937) U1.63@99.679,193.303
  Bottom Layer w0.152: 1602.12@56.34,186.383 cw(c55.366,186.289) 56.058,185.598 ; 1602.12@56.491,186.397 cw(c55.784,186.329) 56.286,185.826 cw(c56.789,185.324) 1602.12@56.857,186.031 ; 1602.12@56.843,185.88 ccw(c56.749,184.906) 56.058,185.598 ; 1602.12@56.896,186.436 56.058,185.598 ; v1@94.625,186.877 ccw(c94.157,186.41) 94.157,187.071 ccw(c94.157,187.732) v1@94.625,187.265 ; v1(94.818,187.071) 67.183,187.071 57.988,177.876 56.515,177.876 56.058,178.333 56.058,185.598
GPIO06: 1602.13 GPIO.13 U1.65 | length 82.3
  Top Layer w0.152: 1602.13@56.896,183.896 58.621,183.896 61.151,181.365 63.779,181.365 64.059,181.645 64.059,196.139 ; 1602.13@57.183,183.609 cw(c57.877,182.915) 57.877,183.896 cw(c57.877,184.877) 1602.13@57.183,184.183 ; 1602.13@57.291,183.501 cw(c58.245,182.547) 58.245,183.896 cw(c58.245,185.245) 1602.13@57.291,184.291 ; GPIO.13@64.356,197.016 cw(c63.319,196.878) 64.059,196.139 ; GPIO.13@64.507,197.036 cw(c63.705,196.929) 64.277,196.357 cw(c64.849,195.785) GPIO.13@64.956,196.587 ; GPIO.13@64.936,196.436 ccw(c64.798,195.399) 64.059,196.139 ; GPIO.13@65.024,197.104 64.059,196.139 ; v1(96.469,190.5) U1.65@101.092,190.5 ; v1@96.663,190.306 cw(c97.13,189.839) 97.13,190.5 cw(c97.13,191.161) v1@96.663,190.694 ; U1.65@99.572,190.13 ccw(c98.677,189.235) 98.677,190.5 ccw(c98.677,191.765) U1.65@99.572,190.87 ; U1.65@99.679,190.237 ccw(c99.045,189.603) 99.045,190.5 ccw(c99.045,191.397) U1.65@99.679,190.763
  Bottom Layer w0.152: GPIO.13@65.024,196.43 cw(c65.024,194.804) 66.174,195.954 cw(c67.324,197.104) GPIO.13@65.698,197.104 ; GPIO.13@65.024,196.583 cw(c65.024,195.324) 65.914,196.214 cw(c66.804,197.104) GPIO.13@65.545,197.104 ; GPIO.13@65.024,196.735 cw(c65.024,195.844) 65.654,196.474 cw(c66.284,197.104) GPIO.13@65.393,197.104 ; GPIO.13@65.024,197.104 66.611,195.517 66.611,193.992 66.992,193.611 93.358,193.611 v1(96.469,190.5) ; v1@96.195,190.5 ccw(c95.534,190.5) 96.002,190.967 ccw(c96.469,191.435) v1@96.469,190.774
GPIO07: 1602.14 GPIO.15 U1.67 | length 78.4
  Top Layer w0.152: 1602.14@56.896,181.356 60.602,181.356 60.872,181.086 64.182,181.086 65.024,181.927 GPIO.15@65.024,194.564 ; 1602.14@57.183,181.069 cw(c57.877,180.375) 57.877,181.356 cw(c57.877,182.337) 1602.14@57.183,181.643 ; 1602.14@57.291,180.961 cw(c58.245,180.007) 58.245,181.356 cw(c58.245,182.705) 1602.14@57.291,181.751 ; GPIO.15@64.548,194.088 cw(c63.397,192.937) 65.024,192.937 cw(c66.651,192.937) GPIO.15@65.5,194.088 ; GPIO.15@64.655,194.195 cw(c63.765,193.305) 65.024,193.305 cw(c66.283,193.305) GPIO.15@65.393,194.195 ; GPIO.15@64.763,194.303 cw(c64.133,193.673) 65.024,193.673 cw(c65.915,193.673) GPIO.15@65.285,194.303 ; U1.67@101.092,187.96 102.235,187.96 v1(102.235,189.306) ; U1.67@101.872,188.33 ccw(c100.994,189.208) v1@102.235,189.208 ; U1.67@101.979,188.223 ccw(c101.362,188.84) 102.235,188.84 ; v1@102.041,189.113 cw(c101.574,188.645) 102.235,188.645 cw(c102.896,188.645) v1@102.429,189.113 ; 102.235,188.874 ccw(c103.156,188.874) U1.67@102.505,188.223 ; v1@102.235,189.241 ccw(c103.523,189.241) U1.67@102.612,188.33
  Bottom Layer w0.152: GPIO.15@65.024,194.564 65.761,194.564 66.331,193.993 66.331,193.675 70.7,189.306 v1(102.235,189.306) ; v1@102.041,189.113 ccw(c101.574,188.645) 101.574,189.306 ccw(c101.574,189.967) v1@102.041,189.5
GPIO10: 1602.4 GPIO.2 U1.69 | length 94.5
  Top Layer w0.152: GPIO.2@67.564,212.344 93.662,212.344 94.183,211.823 94.183,185.737 94.501,185.42 U1.69@101.092,185.42 ; GPIO.2@67.825,212.083 cw(c68.455,211.453) 68.455,212.344 cw(c68.455,213.235) GPIO.2@67.825,212.605 ; GPIO.2@67.933,211.975 cw(c68.823,211.085) 68.823,212.344 cw(c68.823,213.603) GPIO.2@67.933,212.713 ; GPIO.2@68.04,211.868 cw(c69.191,210.717) 69.191,212.344 cw(c69.191,213.971) GPIO.2@68.04,212.82 ; U1.69@99.572,185.05 ccw(c98.677,184.155) 98.677,185.42 ccw(c98.677,186.685) U1.69@99.572,185.79 ; U1.69@99.679,185.157 ccw(c99.045,184.523) 99.045,185.42 ccw(c99.045,186.317) U1.69@99.679,185.683
  Bottom Layer w0.152: 1602.4@56.896,206.756 64.084,206.756 64.529,206.311 65.419,206.311 65.977,206.869 65.977,210.757 GPIO.2@67.564,212.344 ; 1602.4@57.183,206.469 cw(c57.877,205.775) 57.877,206.756 cw(c57.877,207.737) 1602.4@57.183,207.043 ; 1602.4@57.291,206.361 cw(c58.245,205.407) 58.245,206.756 cw(c58.245,208.105) 1602.4@57.291,207.151 ; GPIO.2@66.89,212.344 cw(c65.264,212.344) 66.414,211.194 cw(c67.564,210.044) GPIO.2@67.564,211.67 ; GPIO.2@67.043,212.344 cw(c65.784,212.344) 66.674,211.454 cw(c67.564,210.564) GPIO.2@67.564,211.823 ; GPIO.2@67.195,212.344 cw(c66.304,212.344) 66.934,211.714 cw(c67.564,211.084) GPIO.2@67.564,211.975
GPIO11: 1602.5 GPIO.4 U1.71 | length 93.1
  Top Layer w0.152: GPIO.4@67.564,209.804 93.345,209.804 93.904,209.245 93.904,183.197 94.221,182.88 U1.71@101.092,182.88 ; GPIO.4@67.825,209.543 cw(c68.455,208.913) 68.455,209.804 cw(c68.455,210.695) GPIO.4@67.825,210.065 ; GPIO.4@67.933,209.435 cw(c68.823,208.545) 68.823,209.804 cw(c68.823,211.063) GPIO.4@67.933,210.173 ; GPIO.4@68.04,209.328 cw(c69.191,208.177) 69.191,209.804 cw(c69.191,211.431) GPIO.4@68.04,210.28 ; U1.71@99.572,182.51 ccw(c98.677,181.615) 98.677,182.88 ccw(c98.677,184.145) U1.71@99.572,183.25 ; U1.71@99.679,182.617 ccw(c99.045,181.983) 99.045,182.88 ccw(c99.045,183.777) U1.71@99.679,183.143
  Bottom Layer w0.152: 1602.5@56.896,204.216 58.711,206.031 65.913,206.031 66.257,206.375 66.257,208.497 GPIO.4@67.564,209.804 ; 1602.5@56.896,204.622 ccw(c56.896,205.604) 57.59,204.91 ccw(c58.284,204.216) 1602.5@57.302,204.216 ; 1602.5@56.896,204.775 ccw(c56.896,206.124) 57.85,205.17 ccw(c58.804,204.216) 1602.5@57.455,204.216 ; GPIO.4@66.89,209.804 cw(c65.264,209.804) 66.414,208.654 cw(c67.564,207.504) GPIO.4@67.564,209.13 ; GPIO.4@67.043,209.804 cw(c65.784,209.804) 66.674,208.914 cw(c67.564,208.024) GPIO.4@67.564,209.283 ; GPIO.4@67.195,209.804 cw(c66.304,209.804) 66.934,209.174 cw(c67.564,208.544) GPIO.4@67.564,209.435
GPIO12: 1602.6 GPIO.6 U1.73 | length 93.1
  Top Layer w0.152: GPIO.6@67.564,207.264 93.053,207.264 93.624,206.692 93.624,180.657 93.942,180.34 U1.73@101.092,180.34 ; GPIO.6@67.825,207.003 cw(c68.455,206.373) 68.455,207.264 cw(c68.455,208.155) GPIO.6@67.825,207.525 ; GPIO.6@67.933,206.895 cw(c68.823,206.005) 68.823,207.264 cw(c68.823,208.523) GPIO.6@67.933,207.633 ; GPIO.6@68.04,206.788 cw(c69.191,205.637) 69.191,207.264 cw(c69.191,208.891) GPIO.6@68.04,207.74 ; U1.73@99.572,179.97 ccw(c98.677,179.075) 98.677,180.34 ccw(c98.677,181.605) U1.73@99.572,180.71 ; U1.73@99.679,180.077 ccw(c99.045,179.443) 99.045,180.34 ccw(c99.045,181.237) U1.73@99.679,180.603
  Bottom Layer w0.152: 1602.6@56.896,201.676 58.637,203.417 65.838,203.417 66.257,203.835 66.257,205.957 GPIO.6@67.564,207.264 ; 1602.6@56.896,202.082 ccw(c56.896,203.064) 57.59,202.37 ccw(c58.284,201.676) 1602.6@57.302,201.676 ; 1602.6@56.896,202.235 ccw(c56.896,203.584) 57.85,202.63 ccw(c58.804,201.676) 1602.6@57.455,201.676 ; GPIO.6@66.89,207.264 cw(c65.264,207.264) 66.414,206.114 cw(c67.564,204.964) GPIO.6@67.564,206.59 ; GPIO.6@67.043,207.264 cw(c65.784,207.264) 66.674,206.374 cw(c67.564,205.484) GPIO.6@67.564,206.743 ; GPIO.6@67.195,207.264 cw(c66.304,207.264) 66.934,206.634 cw(c67.564,206.004) GPIO.6@67.564,206.895
GPIO13: GPIO.8 U1.75 | length 71.6
  Top Layer w0.152: GPIO.8@67.564,204.724 74.93,204.724 75.413,204.241 v1(75.413,186.157) ; GPIO.8@67.825,204.463 cw(c68.455,203.833) 68.455,204.724 cw(c68.455,205.615) GPIO.8@67.825,204.985 ; GPIO.8@67.933,204.355 cw(c68.823,203.465) 68.823,204.724 cw(c68.823,205.983) GPIO.8@67.933,205.093 ; GPIO.8@68.04,204.248 cw(c69.191,203.097) 69.191,204.724 cw(c69.191,206.351) GPIO.8@68.04,205.2 ; v1@75.219,186.35 ccw(c74.752,186.818) 75.413,186.818 ccw(c76.074,186.818) v1@75.606,186.35 ; U1.75@101.092,177.8 102.972,177.8 ; U1.75@102.738,177.633 cw(c102.972,177.554) 102.972,177.8 ; U1.75@102.738,177.967 ccw(c102.972,178.046) 102.972,177.8 ; v1@102.803,176.724 ccw(c102.336,177.191) 102.997,177.191 ccw(c103.658,177.191) v1@103.191,176.724 ; v1(102.997,176.53) 102.997,177.775 102.972,177.8
  Bottom Layer w0.152: v1(75.413,186.157) 93.37,186.157 v1(102.997,176.53) ; v1@75.606,185.963 cw(c76.074,185.496) 76.074,186.157 cw(c76.074,186.818) v1@75.606,186.35 ; v1@102.723,176.53 ccw(c102.062,176.53) 102.53,176.997 ccw(c102.997,177.465) v1@102.997,176.804
INT: EXTCTRL.9 U1.77 | length 176
  Top Layer w0.152: EXTCTRL.9@79.756,18.796 94.031,33.071 94.031,118.844 94.432,119.245 94.432,153.868 96.587,156.023 102.67,156.023 103.048,156.4 103.048,175.235 103.022,175.26 ; EXTCTRL.9@79.756,19.202 ccw(c79.756,20.184) 80.45,19.49 ccw(c81.144,18.796) EXTCTRL.9@80.162,18.796 ; EXTCTRL.9@79.756,19.355 ccw(c79.756,20.704) 80.71,19.75 ccw(c81.664,18.796) EXTCTRL.9@80.315,18.796 ; U1.77@101.092,175.26 103.022,175.26 ; U1.77@102.727,175.062 cw(c103.022,174.941) 103.022,175.26 ; U1.77@102.727,175.458 ccw(c103.022,175.579) 103.022,175.26
MISO: U1.6 U7.5 | length 51.4
  Top Layer w0.152: U1.6@157.48,203.2 v1(160.833,203.2) ; U1.6@158.893,202.937 cw(c159.527,202.303) 159.527,203.2 cw(c159.527,204.097) U1.6@158.893,203.463 ; U1.6@159,202.83 cw(c159.895,201.935) 159.895,203.2 cw(c159.895,204.465) U1.6@159,203.57 ; v1@160.639,203.006 ccw(c160.172,202.539) 160.172,203.2 ccw(c160.172,203.861) v1@160.639,203.394 ; U7.5@190.5,196.596 192.405,196.596 192.761,196.952 v1(192.761,201.574) ; U7.5@191.373,196.434 cw(c191.763,196.044) 191.763,196.596 cw(c191.763,197.148) U7.5@191.373,196.758 ; v1@192.567,201.381 cw(c192.1,200.913) 192.761,200.913 cw(c193.422,200.913) v1@192.954,201.381
  Bottom Layer w0.152: v1(160.833,203.2) 185.42,203.2 187.046,201.574 v1(192.761,201.574) ; v1@161.026,203.006 cw(c161.494,202.539) 161.494,203.2 cw(c161.494,203.861) v1@161.026,203.394 ; v1@192.567,201.381 ccw(c192.1,200.913) 192.1,201.574 ccw(c192.1,202.235) v1@192.567,201.768
MISO1: EXT_SPI.2 U7.3 | length 62
  Top Layer w0.152: v1@188.198,179.568 ccw(c187.731,180.036) 188.392,180.036 ccw(c189.053,180.036) v1@188.585,179.568 ; v1(188.392,179.375) 188.392,201.663 188.912,202.184 191.694,202.184 191.719,202.159 191.719,199.441 ; U7.3@190.5,199.136 191.414,199.136 191.719,199.441 ; U7.3@191.238,199.207 ccw(c191.344,199.484) 191.553,199.274 ; U7.3@191.293,199.35 ccw(c191.436,199.724) 191.719,199.441
  Bottom Layer w0.152: v1(188.392,179.375) 192.151,183.134 213.995,183.134 214.376,183.515 ; v1@188.392,179.649 ccw(c188.392,180.31) 188.859,179.842 ccw(c189.327,179.375) v1@188.666,179.375 ; EXT_SPI.2@214.194,183.755 cw(c214.126,183.515) 214.376,183.515 ; EXT_SPI.2@214.376,184.404 214.376,183.515 ; EXT_SPI.2@214.558,183.755 ccw(c214.626,183.515) 214.376,183.515
MISO2: EXT_SPI.4 U7.2 | length 64.1
  Top Layer w0.152: U7.2@189.623,200.248 ccw(c189.255,199.898) 189.255,200.406 ; U7.2@189.623,200.564 cw(c189.255,200.914) 189.255,200.406 ; U7.2@190.5,200.406 189.255,200.406 ; v1@192.45,175.768 ccw(c191.789,175.768) 192.257,176.235 ccw(c192.724,176.703) v1@192.724,176.042 ; v1(192.724,175.768) 191.313,177.179 191.313,189.535 189.23,191.618 189.255,200.406
  Bottom Layer w0.152: v1(192.724,175.768) 207.62,175.768 209.652,177.8 215.024,177.8 215.609,178.385 215.609,180.631 EXT_SPI.4@214.376,181.864 ; v1@192.918,175.574 cw(c193.385,175.107) 193.385,175.768 cw(c193.385,176.429) v1@192.918,175.962 ; EXT_SPI.4@214.376,181.19 cw(c214.376,179.564) 215.526,180.714 cw(c216.676,181.864) EXT_SPI.4@215.05,181.864 ; EXT_SPI.4@214.376,181.343 cw(c214.376,180.084) 215.266,180.974 cw(c216.156,181.864) EXT_SPI.4@214.897,181.864 ; EXT_SPI.4@214.376,181.495 cw(c214.376,180.604) 215.006,181.234 cw(c215.636,181.864) EXT_SPI.4@214.745,181.864
MISO3: EXT_SPI.6 U7.1 | length 58
  Top Layer w0.152: 189.102,201.559 ccw(c189.039,202.31) U7.1@189.614,201.824 ; 189.386,201.583 cw(c189.415,201.234) U7.1@189.641,201.501 ; 189.468,201.59 ccw(c189.436,201.974) U7.1@189.731,201.725 ; U7.1@190.5,201.676 188.671,201.524 188.671,190.017 190.195,188.493 190.195,177.19 v1(190.785,176.601) ; v1@190.511,176.601 ccw(c189.85,176.601) 190.318,177.068 ccw(c190.785,177.535) v1@190.785,176.874
  Bottom Layer w0.152: v1(190.785,176.601) 192.543,178.359 213.411,178.359 ; EXT_SPI.6@213.708,179.236 cw(c212.671,179.098) 213.411,178.359 ; EXT_SPI.6@213.859,179.256 cw(c213.057,179.149) 213.629,178.577 cw(c214.201,178.005) EXT_SPI.6@214.308,178.807 ; EXT_SPI.6@214.288,178.656 ccw(c214.15,177.619) 213.411,178.359 ; EXT_SPI.6@214.376,179.324 213.411,178.359
MISO4: EXT_SPI.8 U7.15 | length 58.1
  Top Layer w0.152: U7.15@196.088,200.406 198.044,200.406 198.425,200.025 198.425,190.094 v1(198.145,189.814) ; U7.15@196.961,200.244 cw(c197.351,199.854) 197.351,200.406 cw(c197.351,200.958) U7.15@196.961,200.568
  Bottom Layer w0.152: v1(198.145,189.814) 215.595,189.814 216.179,189.23 216.179,174.498 214.96,173.279 213.804,173.279 213.411,173.672 213.411,175.819 ; v1@198.339,189.621 cw(c198.806,189.153) 198.806,189.814 cw(c198.806,190.475) v1@198.339,190.008 ; EXT_SPI.8@213.708,176.696 cw(c212.671,176.558) 213.411,175.819 ; EXT_SPI.8@213.859,176.716 cw(c213.057,176.609) 213.629,176.037 cw(c214.201,175.465) EXT_SPI.8@214.308,176.267 ; EXT_SPI.8@214.288,176.116 ccw(c214.15,175.079) 213.411,175.819 ; EXT_SPI.8@214.376,176.784 213.411,175.819